# Altium PCB PCB1.PcbDoc (part 2 of 2)
Units mil, origin at the board's own origin, x right, y up, seen from the top; angles counter-clockwise.
Board outline 3553.34 x 3553.34 mil, 2 copper layers (Top Layer, Bottom Layer); 128 components, 103 nets, 393 pads, 82 vias.
Unrouted connection lines stored in the file: 8.
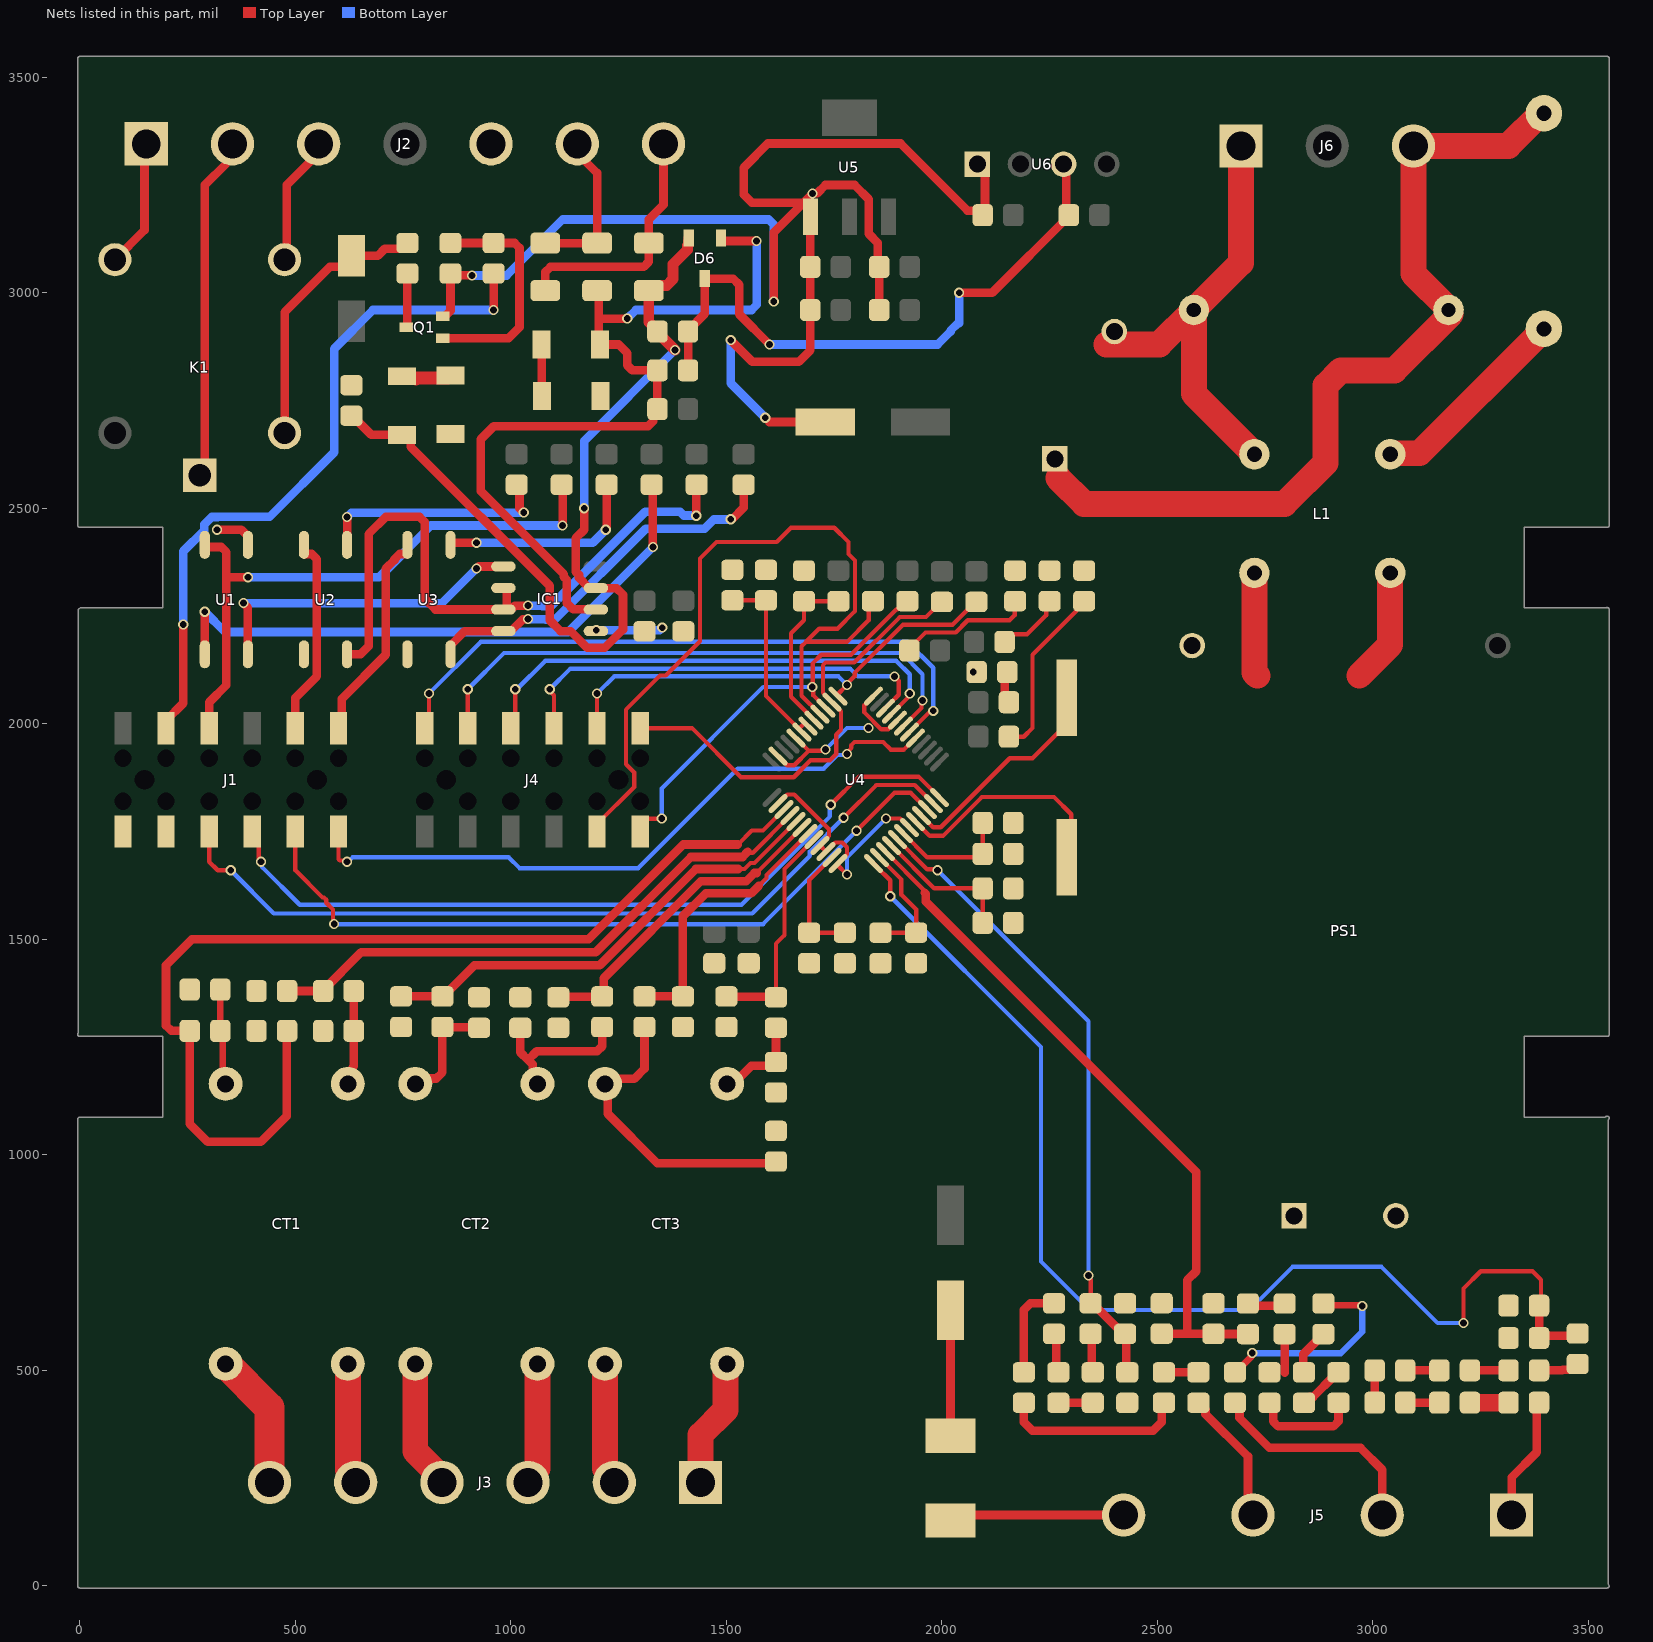
[diagram p2: the nets of this part, all layers, seen from the top]

## Via types
v1: diameter 23.62, hole 15.75, Top Layer to Bottom Layer, 82 vias

## Nets (pads, with @x,y where several pads share a name; then routed paths per layer and width w, separated by ;. In a path a pad name is that pad's centre, name@x,y a point inside that pad or via, vN(x,y) a via of type N, cw(c..) or ccw(c..) an arc to the next point about the centre after c; other vN are vias at no path point) (continued)
GND: C1.1 C2.2 C3.1 C4.2 C8.1 C10.1 C11.2 C12.1 C13.1 C14.1 C15.1 C16.2 C17.1 C18.1 C19.1 C20.1 C21.1 C22.1 C23.1 C24.2 C25.1 C26.1 C27.1 C29.1 C31.1 C32.1 F1.2 J1.9 J1.11 PS1.3 Q1.2 R1.2 R3.1 R8.1 R9.2 R12.1 R25.1 R26.2 R30.2 R33.2 R34.2 R35.2 R36.2 R38.2 R41.2 R44.2 R45.2 R59.2 U1.3 U4.2 U4.9 U4.10 U4.12 U4.19 U4.32 U4.36 U4.44 U4.47 U5.1 U6.1 | length 5139.5
  Top Layer w10: U4.2@1619.74,1815.02 1619.74,1816.12 1630.9,1827.28 1632.49,1827.28 1641.23,1836.01 1657.5,1836.01 1738.17,1755.34 1738.17,1739.68 U4.9@1730,1731.51 ; U4.47@1619.74,1924.98 1620.23,1924.98 1641.23,1903.99 1657.5,1903.99 1690.51,1937 1690.51,1937.73 ; U4.44@1661.5,1966.74 1690.51,1937.73 ; U4.9@1717.18,1717.58 1717.58,1717.58 U4.9@1720,1720 ; U4.9@1717.77,1717.77 1717.77,1716.99 U4.10@1731.1,1703.66 1731.59,1703.66 1752.58,1724.66 1768.86,1724.66 1779.93,1713.58 1779.93,1697.31 1758.94,1676.31 U4.12@1758.94,1675.82 1757.15,1674.03 1757.15,1672.85 v1(1780,1650) ; v1(1730,1940) 1727.73,1937.73 1690.51,1937.73 ; U4.36@1841.06,2064.18 1841.06,2063.69 1820.07,2042.69 1820.07,2026.42 1858.98,1987.5 1875.26,1987.5 1883.08,1995.33 U4.32@1884.67,1995.33 ; v1(1870,1780) 1870.33,1780.33 1903.1,1780.33 1911.41,1772.02 1911.41,1771.41 1923.48,1759.34 U4.19@1924.58,1759.34 ; v1(2072.76,2120) R33.2@2080.63,2119.99
  Top Layer w20: v1@317.99,2450 v1(318.27,2450) 374.85,2450 390,2434.85 U1.3@390,2410 ; Q1.2@842.32,2945.59 847.24,2945.59 860,2958.35 860,3036.69 863.99,3040.69 909.31,3040.69 v1(910,3040) ; v1(1510,2890) 1560,2840 1668.28,2840 1694.57,2866.28 C19.1@1694.57,2960.01 C18.1@1694.57,3060.01 1694.72,3060.16 1694.72,3144.72 1700,3150 1694.88,3155.12 1694.88,3200.79 1687.17,3208.5 1559.34,3208.5 1540.19,3227.65 1540.19,3290.19 1596.17,3346.17 1903.83,3346.17 2059.34,3190.66 2080.94,3190.66 2090.01,3181.59 2090.01,3180.01 2100,3190 2100,3300 2098.23,3298.23 U6.1@2082.28,3298.23 ; v1(1590,2710) 1600,2700 C16.2@1729.76,2700 ; v1(1610,2980) 1610,3140 1700.69,3230.69 1710.69,3230.69 1730,3250 1797.11,3250 1830,3217.11 1830,3136.67 1851.07,3115.6 1851.07,3051.07 1850,3050 1854.57,3045.43 C23.1@1854.57,2960.01 ; F1.2@2020,348.43 C24.2@2020,639.53
  Bottom Layer w10: v1(1730,1940) 1780,1990 v1(1830,1990) ; v1(1780,1650) 1780,1690 v1(1870,1780)
  Bottom Layer w20: v1(910,3040) 990,3040 1120,3170 1598.28,3170 1610,3158.28 v1(1610,2980) ; v1(1510,2890) 1510,2790 v1(1590,2710)
  other v1: 1700,3230
GND_RS485: C5.1 C6.1 C7.1 C9.1 C28.1 D3.1 D5.1 D6.3 IC1.5 J2.5 R5.1 U2.3 U3.3 U6.3 | length 1635.2
  Top Layer w20: R5.1@630.01,2785.43 R5.1@630.01,2793.3 ; J2.5@954.13,3345.47 J2.5@957.07,3342.54 ; IC1.5@1197.28,2215 1197.28,2216.28 v1(1198,2217) ; C6.1@1410.87,2819.99 1411.56,2820.68 1411.56,2909.3 C7.1@1410.87,2909.99 ; C7.1@1410.87,2911.96 1450,2951.1 1450,3030.94 1451.81,3032.76 1515.53,3032.76 1530,3018.28 1530,2950 v1(1600,2880) ; v1(2040,3000) 2116.53,3000 2294.57,3178.04 C28.1@2294.57,3180.01 2288.43,3186.15 2288.43,3292.09 U6.3@2282.28,3298.23
  Bottom Layer w20: v1(1198,2217) 1345,2217 v1(1351,2223) ; v1(1600,2880) 1990,2880 2020.19,2910.19 2020.19,2912.35 2037.65,2929.81 2039.81,2929.81 2040,2930 v1(2040,3000)
IAN: C2.1 R4.2 U4.4 | length 1338.9
  Top Layer w10: 1549.79,1703.46 1552.68,1700.57 1560.97,1700.57 U4.4@1647.58,1787.18
  Top Layer w20: C2.1@480.87,1380 R4.2@564.57,1380 564.57,1381.97 652.6,1470 1196.86,1470 1417.92,1691.06 1537.39,1691.06 1549.79,1703.46
IAP: C1.2 R2.2 U4.3 | length 2475.5
  Top Layer w10: 1526.74,1720 1558.99,1752.25 1584.81,1752.25 U4.3@1633.66,1801.1
  Top Layer w20: C1.2@480.87,1287.59 488.73,1287.59 480,1278.84 480,1090 420,1030 296.72,1030 255,1071.72 R2.2@255,1287.58 212.42,1287.58 200,1300 200,1440 260,1500 1180,1500 1400,1720 1526.74,1720
IBN: C4.1 R16.2 U4.6 | length 757.9
  Top Layer w10: 1570,1653.92 U4.6@1675.42,1759.34
  Top Layer w20: C4.1@1110.01,1365.43 1111.05,1366.48 1196.21,1366.48 1200,1362.69 1200,1360 1207.52,1367.52 R16.2@1211.8,1367.52 1215.49,1371.2 1215.49,1409.43 1441.11,1635.06 1546.45,1635.06 1565.31,1653.92 1570,1653.92
IBP: C3.2 R7.2 U4.5 | length 1084.1
  Top Layer w10: 1527.78,1663.06 1541.92,1663.06 1555.78,1676.92 1565.16,1676.92 U4.5@1661.5,1773.26
  Top Layer w20: C3.2@745.43,1367.52 R7.2@841.22,1367.52 843.19,1367.52 915.67,1440 1206.46,1440 1429.52,1663.06 1527.78,1663.06
ICN: C11.1 R24.2 U4.8 | length 523.9
  Top Layer w10: R24.2@1614.99,1365.43 1614.99,1489.91 1634.81,1509.72 1634.81,1663.05 1701.8,1730.05 1702.91,1730.05 1703.26,1730.4 U4.8@1703.26,1731.5
  Top Layer w20: C11.1@1500.01,1367.52 1501.05,1366.48 1603.52,1366.48 1610,1360 1614.99,1364.99 R24.2@1614.99,1365.43
ICP: C8.2 R19.2 U4.7 | length 648.9
  Top Layer w10: 1575.41,1624.42 1593,1642.01 1593,1649.08 U4.7@1689.34,1745.42
  Top Layer w20: R19.2@1309.99,1367.52 C8.2@1399.03,1367.52 1399.03,1553.37 1452.71,1607.06 1558.05,1607.06 1575.41,1624.42
ISOL_RE: IC1.2 IC1.3 R22.1 U2.4 | length 1515.6
  Top Layer w20: U2.4@620,2161.22 651.22,2161.22 670,2180 670,2440 710,2480 788.28,2480 800,2468.28 800,2290 825,2265 IC1.3@982.72,2265 ; IC1.2@982.72,2315 985,2315 990,2310 990,2266.67 990.98,2265.69 1001.12,2265.69 1009.17,2273.74 1039.31,2273.74 v1(1040,2274.43) ; v1(1430,2482.46) 1430,2540.94 1439.06,2550 1440,2550 1435.43,2554.57 R22.1@1431.05,2554.57
  Bottom Layer w20: v1(1040,2274.43) 1040.69,2273.74 1071.5,2273.74 1072.62,2272.62 1092.62,2272.62 1311.64,2491.64 1392.46,2491.64 1400.94,2483.16 1429.31,2483.16 v1(1430,2482.46)
ISOL_RX: IC1.1 U1.2 | length 760.8
  Top Layer w20: v1(380,2280) 380,2279.02 390,2269.02 U1.2@390,2161.22 ; v1(920,2360) 920.98,2360 925.98,2365 IC1.1@982.72,2365
  Bottom Layer w20: v1(380,2280) 840,2280 v1(920,2360)
ISOL_TX: IC1.4 R23.1 U3.4 | length 887.9
  Top Layer w20: U3.4@860,2161.22 860,2181.89 893.11,2215 1000.43,2215 1027.55,2242.12 1039.31,2242.12 v1(1040,2242.81) ; v1(1510,2474.68) 1510.69,2475.37 1514.42,2475.37 1539.99,2500.94 R23.1@1539.99,2554.57
  Bottom Layer w20: v1(1040,2242.81) 1040.69,2242.12 1079.88,2242.12 1081,2241 1101,2241 1312.65,2452.65 1449.47,2452.65 1470.8,2473.98 1509.31,2473.98 v1(1510,2474.68)
NetC2_1: C30.1 J6.1 L1.1 VR1.2 | length 1054.6
  Top Layer w60: 2381.59,2880 2504.72,2880 C30.1@2584.72,2960 ; J6.1@2693.9,3340.55 2693.9,3069.17 C30.1@2584.72,2960 ; L1.1@2725,2625.59 2584.72,2765.87 C30.1@2584.72,2960
NetC2_2: C30.2 J6.3 R62.1 VR1.1 | length 1985.2
  Top Layer w60: 2270.2,2569.8 2330,2510 2794.85,2510 2890,2605.15 2890,2784.85 2925.15,2820 3050,2820 3180,2950 3175.28,2954.72 C30.2@3175.28,2960 3175.28,2962.94 3093.9,3044.32 J6.3@3093.9,3333.9 ; J6.3@3093.9,3340.55 J6.3@3093.9,3333.9 ; R62.1@3396.65,3416.34 3389.89,3416.34 3314.1,3340.55 3100.55,3340.55 J6.3@3093.9,3333.9
NetCT1_1: CT1.1 J3.6 | length 317.3
  Top Layer w70: CT1.1@338.27,515.2 440,413.46 J3.6@440,240
NetCT1_2: CT1.2 J3.5 | length 282.8
  Top Layer w60: CT1.2@621.73,515.2 621.73,269.2 640,250.93 J3.5@640,240
NetCT1_3: CT1.3 R1.1 R2.1 | length 223.7
  Top Layer w15: R1.1@325.87,1383.36 R2.1@325.87,1287.58 332.07,1281.38 332.07,1171 CT1.3@338.27,1164.8
NetCT1_4: CT1.4 R3.2 R4.1 | length 220.9
  Top Layer w20: CT1.4@621.73,1164.8 632.97,1176.04 632.97,1203.43 635.43,1205.89 R3.2@635.43,1287.59 R4.1@635.43,1380
NetCT2_1: CT2.1 J3.4 | length 302.2
  Top Layer w60: CT2.1@778.27,515.2 778.27,511.73 780,510 778.27,508.27 778.27,312.66 840,250.93 J3.4@840,240
NetCT2_2: CT2.2 J3.3 | length 284.2
  Top Layer w60: J3.3@1040,240 1040,250.93 1061.73,272.66 CT2.2@1061.73,515.2
NetCT2_3: CT2.3 R7.1 R9.1 | length 265.4
  Top Layer w20: CT2.3@778.27,1164.8 790.46,1177 827,1177 841.22,1191.22 R7.1@841.22,1296.65 842.26,1295.61 925.35,1295.61 R9.1@926.39,1294.57
NetCT2_4: CT2.4 R12.2 R16.1 | length 376.1
  Top Layer w20: R12.2@1021.82,1294.57 1021.82,1238.18 1040,1220 ; CT2.4@1061.73,1164.8 1061.73,1180.7 1050.49,1191.94 1050.49,1209.51 1040,1220 ; R16.1@1211.8,1296.65 1211.8,1251.8 1200,1240 1060,1240 1040,1220
NetCT3_1: CT3.1 J3.2 | length 284.2
  Top Layer w60: CT3.1@1218.27,515.2 1218.27,272.66 1240,250.93 J3.2@1240,240
NetCT3_2: CT3.2 J3.1 | length 300.8
  Top Layer w60: J3.1@1440,240 1440,350 1498.15,408.15 1498.15,511.61 CT3.2@1501.73,515.2
NetCT3_3: CT3.3 R19.1 R26.1 | length 729.1
  Top Layer w15: R19.1@1309.99,1296.65 R19.1@1309.99,1299.99
  Top Layer w20: R19.1@1310,1300 1310,1200 1286.04,1176.04 1229.51,1176.04 CT3.3@1218.27,1164.8 1224.57,1158.5 1224.57,1095.43 1340,980 1611.69,980 1615,976.69 R26.1@1614.99,984.57
NetCT3_4: CT3.4 R24.1 R25.2 | length 213.4
  Top Layer w20: CT3.4@1501.73,1164.8 1516.28,1164.8 1558.06,1206.58 1606.14,1206.58 R25.2@1614.99,1215.43 R24.1@1614.99,1294.57
NetD1_1: D1.1 K1.COIL2 R6.2 | length 633.8
  Top Layer w20: K1.COIL2@475,2675 475,2955 580.22,3060.22 608.5,3060.22 630,3081.72 D1.1@630,3085.79 691.5,3085.79 707.52,3101.81 746.37,3101.81 R6.2@759.99,3115.43
NetD3_2: D4.2 D5.2 | length 120.3
  Top Layer w20: D4.2@1071.32,2880 1071.7,2879.62 1071.7,2760.38 D5.2@1072.09,2760
NetD4_2: D2.2 D3.2 | length 117.9
  Top Layer w30: D2.2@747.86,2806.1 753.53,2800.43 779.57,2800.43 780,2800 782.52,2802.52 854.61,2802.52 D3.2@860,2807.91
NetF1_1: F1.1 J5.4 | length 407
  Top Layer w20: F1.1@2020,151.57 2032.8,164.37 J5.4@2421.65,164.37
NetJ2_1: J2.1 K1.NC | length 308.1
  Top Layer w20: K1.NC@81.3,3076.57 150,3145.28 J2.1@150,3350
  Top Layer w70: J2.1@150,3350 154.13,3345.87 J2.1@154.13,3345.47
NetJ2_2: J2.2 K1.COM | length 800.4
  Top Layer w20: K1.COM@278.15,2576.57 290,2588.43 290,3250 340,3300 340,3331.34 J2.2@354.13,3345.47
NetJ2_3: J2.3 K1.NO | length 306.5
  Top Layer w20: K1.NO@475,3076.57 480,3081.57 480,3250 560,3330 554.13,3335.87 J2.3@554.13,3345.47
NetJ2_6: J2.6 R13.2 R15.2 | length 382.9
  Top Layer w20: R13.2@1080,3115.12 R15.2@1200,3115.12 1200,3277.92 1144.53,3333.4 1144.53,3345.47 J2.6@1154.13,3345.47
NetJ2_7: J2.7 R13.1 R18.2 | length 606.5
  Top Layer w20: R13.1@1080,3004.88 1080,3048.19 1091.81,3060 1308.19,3060 1320,3071.81 R18.2@1320,3115.12 1320,3170 1354.13,3204.13 J2.7@1354.13,3354.13 ; J2.7@1354.13,3345.47 J2.7@1354.13,3354.13 ; J2.7@1360,3360 J2.7@1354.13,3354.13
NetJ3_1: J5.1 R61.2 | length 287.1
  Top Layer w20: J5.1@3321.65,164.37 3321.65,251.65 3380,310 3380,419.57 R61.2@3385.43,425.01
NetJ3_2: J5.2 R48.2 | length 525.4
  Top Layer w20: R48.2@2680.01,424.57 2690.35,414.22 2690.35,389.65 2760,320 2971.21,320 3021.65,269.56 J5.2@3021.65,164.37
NetJ3_3: J5.3 R47.2 | length 323.1
  Top Layer w20: R47.2@2595.01,424.57 2594.57,424.57 2590,420 2600.27,420 2611.65,408.62 2611.65,398.35 2710,300 2710,176.02 J5.3@2721.65,164.37
NetJ5_6: J4.6 U4.34 | length 1012.8
  Top Layer w10: v1(1090,2080) 1090,2076.31 1100,2066.31 J4.6@1100,1989.98 ; U4.34@1868.9,2036.34 1868.9,2037.44 1880.73,2049.27 1881.83,2049.27 1900,2067.44 1900,2100 v1(1890,2110)
  Bottom Layer w10: v1(1090,2080) 1138,2128 1787.09,2128 1805.09,2110 v1(1890,2110)
NetJ5_8: J4.8 U4.33 | length 1159.6
  Top Layer w10: J4.8@1000,1989.98 1010,1999.98 v1(1010,2080) ; U4.33@1882.82,2022.42 1922.58,2062.18 1922.58,2067.39 v1(1925.19,2070)
  Bottom Layer w10: v1(1010,2080) 1013.69,2080 1079.69,2146 1894,2146 1925.19,2114.81 v1(1925.19,2070)
NetJ5_10: J4.10 U4.31 | length 1339.1
  Top Layer w10: J4.10@900,1989.98 v1(900,2080) ; U4.31@1910.66,1994.58 1952.58,2036.5 1952.58,2051.48 v1(1955.19,2054.08)
  Bottom Layer w10: v1(900,2080) 984,2164 1906,2164 1955.19,2114.81 v1(1955.19,2054.08)
NetJ5_12: J4.12 U4.30 | length 1504.6
  Top Layer w10: J4.12@800,1989.98 810,1999.98 v1(810,2070) ; U4.30@1924.58,1980.66 1971.31,2027.39 1977.39,2027.39 v1(1980,2030)
  Bottom Layer w10: v1(810,2070) 930,2190 1920,2190 1980,2130 v1(1980,2030)
NetJ6_1: J1.1 U4.29 | length 1564.9
  Top Layer w10: J1.1@600,1750.02 600,1685.86 603.25,1682.61 617.39,1682.61 v1(620,1680) ; v1(1779.62,1930) 1779.62,1933.69 1790,1944.06 1790,1950.47 1797.07,1957.54 1863.61,1957.54 1881.15,1940 1911.76,1940 U4.29@1938.5,1966.74
  Bottom Layer w10: v1(620,1680) 622.67,1680 632.67,1690 995.09,1690 1019.9,1665.19 1295.73,1665.19 1526.08,1895.54 1725.54,1895.54 1757.39,1927.39 1777.02,1927.39 v1(1779.62,1930)
NetJ6_2: J1.2 U3.2 | length 505.9
  Top Layer w20: J1.2@600,1989.98 607.48,1997.46 607.48,2057.48 710,2160 710,2360 730,2380 730,2381.93 741.87,2393.8 758.33,2393.8 760,2395.47 U3.2@760,2420
NetJ6_3: J1.3 U4.22 | length 1772.8
  Top Layer w10: J1.3@500,1750.02 500,1660 563.19,1596.81 566.63,1596.81 571.63,1591.81 571.63,1584.74 587.39,1568.98 587.39,1537.8 v1(590,1535.19) ; v1(1802.03,1752.03) 1890,1840 1927.44,1840 U4.22@1966.34,1801.1
  Bottom Layer w10: v1(590,1535.19) 1585.19,1535.19 v1(1802.03,1752.03)
NetJ6_4: J1.4 U2.2 | length 468
  Top Layer w20: J1.4@500,1989.98 500,2060 550,2110 550,2381.93 538.13,2393.8 521.67,2393.8 520,2395.47 U2.2@520,2415.16
NetJ6_5: J1.5 U4.24 | length 1857.6
  Top Layer w10: J1.5@400,1750.02 415.08,1734.94 415.08,1688.61 420,1683.69 v1(420,1680) ; v1(1742.03,1812.03) 1807.39,1877.39 1945.72,1877.39 U4.24@1994.18,1828.94
  Bottom Layer w10: v1(420,1680) 422.61,1677.39 422.61,1667.39 510,1580 1534.91,1580 1740.13,1785.22 1740.13,1810.13 v1(1742.03,1812.03)
NetJ6_7: J1.7 U4.23 | length 1947.1
  Top Layer w10: J1.7@300,1750.02 300,1680 320,1660 v1(350,1660) ; v1(1772.03,1782.03) 1848,1858 1937,1858 1979.98,1815.02 U4.23@1980.26,1815.02
  Bottom Layer w10: v1(350,1660) 450,1560 1560,1560 1693.7,1693.7 1693.7,1703.7 v1(1772.03,1782.03)
NetJ6_8: J1.8 R14.2 U1.4 | length 1424.8
  Top Layer w20: U1.4@290,2420 290,2411.67 291.67,2410 328.28,2410 340,2398.28 340,2340 ; J1.8@300,1989.98 300,2050 340,2090 340,2340 ; v1(390,2340) 340,2340 ; R14.2@1117.86,2554.57 1117.86,2557.86 1120,2560 v1(1120,2460)
  Bottom Layer w20: v1(390,2340) 694.51,2340 814.51,2460 v1(1120,2460)
NetJ6_10: J1.10 R10.1 | length 1611.8
  Top Layer w20: J1.10@200,1989.98 200,2007.4 240,2047.4 v1(240,2230) ; v1(960,2960) 960,3036.69 R10.1@959.99,3044.57
  Bottom Layer w20: v1(240,2230) 240,2400 288.46,2448.46 288.46,2462.35 305.92,2479.81 319.81,2479.81 320,2480 440,2480 590,2630 590,2870 680,2960 v1(960,2960)
NetL1_2: L1.2 PS1.2 | length 246.4
  Top Layer w60: L1.2@2725,2355 2725,2118.31 2731.89,2111.42
NetL1_3: L1.3 PS1.1 | length 268.3
  Top Layer w60: 2968.11,2111.42 3039.96,2183.27 L1.3@3039.96,2350
NetL1_4: L1.4 R62.2 | length 477.3
  Top Layer w60: L1.4@3039.96,2625.59 3042.04,2627.67 3107.98,2627.67 3390,2909.69 3390,2910 3396.34,2916.34 R62.2@3396.65,2916.34
NetLED1_2: LED4.2 R41.1 | length 419.4
  Top Layer w10: LED4.2@2145.43,1970.01 2190.01,1970.01 2210,1990 2210,2160 2312.39,2262.39 2312.39,2266.31 2326.08,2280 R41.1@2330,2280 ; R41.1@2329.99,2280.01 R41.1@2329.99,2284.57
NetLED2_2: LED3.2 R33.1 | length 70
  Top Layer w20: LED3.2@2145.43,2050.01 R33.1@2145.43,2119.99
NetLED3_2: LED2.2 R38.1 | length 158.1
  Top Layer w10: LED2.2@2145.43,2190.01 2163.03,2207.61 2197.61,2207.61 2241.8,2251.8 2241.8,2276.38 R38.1@2249.99,2284.57
NetLED4_2: LED1.2 R36.1 | length 309.4
  Top Layer w10: LED1.2@1924.57,2174.57 1961.94,2211.94 2031.94,2211.94 2060,2240 2156.93,2240 2168.73,2251.8 2168.73,2283.31 R36.1@2169.99,2284.57
NetQ1_1: Q1.1 R8.2 R10.2 | length 536.9
  Top Layer w20: Q1.1@842.32,2894.41 994.41,2894.41 1020,2920 1020,3103.72 1008.28,3115.43 R8.2@859.99,3115.43
NetQ1_3: Q1.3 R6.1 | length 125.5
  Top Layer w20: Q1.3@757.68,2920 757.68,2923.43 760,2925.75 760,3036.69 R6.1@759.99,3044.57
NetR4_1: R20.1 U1.1 | length 1385.8
  Top Layer w20: U1.1@290,2161.22 v1(290,2260) ; R20.1@1326.65,2554.57 1329.31,2551.91 1329.31,2410.69 v1(1330,2410)
  Bottom Layer w20: v1(290,2260) 337,2213 1133,2213 v1(1330,2410)
NetR7_2: R11.2 U2.1 | length 550.4
  Top Layer w20: U2.1@620,2415.16 v1(620,2480) ; R11.2@1013.46,2554.57 1020,2548.02 1020,2500 v1(1030,2490)
  Bottom Layer w20: v1(620,2480) 630,2490 v1(1030,2490)
NetR9_2: R17.2 U3.1 | length 480.8
  Top Layer w20: U3.1@860,2415.16 860,2418.33 861.67,2420 v1@919.02,2420 ; v1(1220,2450) 1222.25,2452.25 1222.25,2546.69 R17.2@1222.26,2554.57
  Bottom Layer w20: v1(920,2420) 1190,2420 v1(1220,2450)
NetR37_1: R58.2 R61.1 | length 89.6
  Top Layer w40: R58.2@3225,425 R61.1@3314.57,425.01
NetR38_1: R56.2 R58.1 | length 79.1
  Top Layer w20: R56.2@3075,425 R58.1@3146.25,425 ; R58.1@3146.27,425 R58.1@3154.13,425
NetR39_1: R55.2 R56.1 | length 80.8
  Top Layer w20: R56.1@3004.13,425 3004.13,495.87 3000,500 R55.2@3004.13,500
NetR40_1: R55.1 R57.2 | length 79.1
  Top Layer w20: R55.1@3075,500 R57.2@3154.13,500
NetR41_1: R57.1 R60.2 | length 101.6
  Top Layer w20: R57.1@3225,500 3300.94,500 3310,509.06 3310,510 3314.57,505.43 R60.2@3314.57,499.99
NetR42_1: R60.1 R63.2 | length 100.2
  Top Layer w20: R60.1@3385.43,499.99 3439.06,499.99 3440.01,500.94 3469.25,500.94 3475.01,506.7 R63.2@3475.01,514.57
NetR46_1: R48.1 R53.2 | length 490.1
  Top Layer w15: R48.1@2680.01,495.43 2681.43,495.43 2718.35,532.36 2718.35,538.35 v1(2720,540) ; R53.2@2885,655 2888.78,651.22 2973.36,651.22 v1(2975.01,649.57)
  Bottom Layer w15: v1(2720,540) 2924.57,540 2925.01,539.57 2975.01,589.57 v1(2975.01,649.57)
NetR47_1: R52.2 R53.1 | length 112.6
  Top Layer w20: R52.2@2830,495.43 2838.21,503.64 2838.21,537.34 2869.41,568.54 2869.41,570.51 2883.03,584.13 R53.1@2885,584.13
NetR48_1: R52.1 R54.2 | length 110.9
  Top Layer w20: R52.1@2839.99,424.57 2853.62,438.19 2860.79,438.19 2910,487.4 2910,490 2915.43,495.43 R54.2@2920,495.43
NetR49_1: R50.2 R54.1 | length 250.6
  Top Layer w20: R50.2@2760,424.57 2768.28,416.28 2768.28,381.72 2780,370 2908.29,370 2920.01,381.72 2920.01,416.69 R54.1@2920,424.57
NetR50_1: R50.1 R51.2 | length 89.1
  Top Layer w20: 2795.01,495 R51.2@2795.01,584.13
NetR51_1: R49.2 R51.1 | length 89.5
  Top Layer w20: R49.2@2710,655 2715.43,649.57 2789.58,649.57 R51.1@2795.01,655
NetR55_1: R46.2 R47.1 | length 80
  Top Layer w20: R46.2@2514.99,495.43 R47.1@2595.01,495.43
NetR56_1: R37.2 R46.1 | length 427.8
  Top Layer w20: R37.2@2190.01,424.57 2190.01,379.99 2210,360 2490,360 2510,380 2510,419.57 R46.1@2514.99,424.57
NetR57_1: R37.1 R39.2 | length 228.6
  Top Layer w20: R37.1@2190.01,495.43 2190.01,640.01 2205.43,655.43 2254.57,655.43 R39.2@2260,650 ; R39.2@2259.99,650.01 R39.2@2259.99,655.43
NetR58_1: R39.1 R40.2 | length 104.1
  Top Layer w20: R39.1@2259.99,584.57 2259.99,589.99 2264.99,585.01 2264.99,500.43 R40.2@2269.99,495.43
NetR59_1: R40.1 R43.2 | length 84.5
  Top Layer w20: R40.1@2269.99,424.57 2274.57,424.57 2280,430 2285.43,424.57 R43.2@2350.01,424.57
NetR60_1: R42.2 R43.1 | length 92.1
  Top Layer w20: R42.2@2345.01,584.57 2345.01,584.99 2347.51,582.49 2347.51,497.93 R43.1@2350.01,495.43
NetU6_20: U4.20 X1.1 | length 483.3
  Top Layer w10: U4.20@1938.5,1773.26 1971.76,1740 2002.73,1740 2092.73,1830 2260,1830 2300,1790 2300,1760 2290,1750 X1.1@2290,1740
NetU6_21: U4.21 X1.2 | length 558.3
  Top Layer w10: U4.21@1952.42,1787.18 1979.6,1760 1997.27,1760 2157.27,1920 2210,1920 2290,2000 X1.2@2290,2110
NRESET: C15.2 R27.1 U4.41 | length 394.3
  Top Layer w10: U4.41@1703.26,2008.5 1703.26,2008.99 1686.35,2025.9 1686.35,2026.51 1650,2062.86 1650,2210 1680.01,2240.01 C15.2@1680.01,2284.57 1685.43,2284.57 1690,2280 1694.57,2284.57 R27.1@1759.99,2284.57
PPEM_CK: J4.2 R31.1 U4.38 | length 1089.3
  Top Layer w10: J4.2@1300,1989.98 1420.02,1989.98 1533.85,1876.15 1656.15,1876.15 1695.19,1915.19 1740.28,1915.19 1754.81,1929.72 1754.81,1974.81 1766.01,1986.01 1766.01,2028.77 1745.02,2049.77 1745.02,2050.75 1724.02,2071.74 1724.02,2136.14 1729.88,2142 1796.54,2142 1902.49,2247.94 1963.21,2247.94 1998.03,2282.76 R31.1@1999.99,2282.76
PPEM_CS: J4.4 R32.1 U4.37 | length 1106.6
  Top Layer w10: J4.4@1200,1989.98 v1(1200,2070) ; U4.37@1758.94,2064.18 1757.15,2065.97 1757.15,2067.15 v1(1780,2090) 1780,2092.93 1797.49,2110.42 1797.49,2117.49 1909.94,2229.94 2024.49,2229.94 2077.3,2282.76 R32.1@2079.99,2282.76
  Bottom Layer w10: v1(1200,2070) 1240,2110 1760,2110 v1(1780,2090)
PPEM_DI: J4.3 R28.1 U4.40 | length 1856.5
  Top Layer w10: J4.3@1200,1750.02 1200,1767.44 1286.03,1853.47 1286.03,1887.19 1266.92,1906.3 1266.92,2032.86 1346.15,2112.1 1359.35,2112.1 1438.58,2191.33 1438.58,2383.44 1477.01,2421.87 1616.97,2421.87 1649.92,2454.81 1750.28,2454.81 1783.39,2421.7 1783.39,2393.87 1798.58,2378.67 1798.58,2261.33 1757.85,2220.59 1715.14,2220.59 1685.25,2190.71 ; 1674.4,2178.86 1674.4,2065.19 U4.40@1717.18,2022.42 ; 1674.4,2179.86 1684.54,2190 1685.25,2190 1780,2190 1830,2240 R28.1@1830,2274.57
  Top Layer w20: R28.1@1830,2274.57 R28.1@1839.99,2284.57
PPEM_DO: J4.1 R29.1 U4.39 | length 984.9
  Top Layer w10: J4.1@1300,1750.02 1300,1764.92 1315.08,1780 v1(1350,1780) ; U4.39@1731.1,2036.34 1701.82,2065.62 1701.82,2082.58 v1(1699.21,2085.19) 1700,2085.98 1700,2140 1720,2160 1789.09,2160 1895.03,2265.94 1896.78,2265.94 1915.4,2284.57 R29.1@1919.99,2284.57
  Bottom Layer w10: v1(1350,1780) 1350,1850 1585.19,2085.19 v1(1699.21,2085.19)
RS485_A: C6.2 D4.1 D6.1 IC1.6 R15.1 R21.1 | length 2000.4
  Top Layer w20: IC1.6@1197.28,2265 1196.59,2265.69 1144.31,2265.69 1130,2280 1130,2333.79 1122.74,2341.05 1122.74,2347.26 930,2540 930,2660 960,2690 1318.28,2690 1330,2701.72 1330,2727.87 1332.13,2730.01 R21.1@1340,2730.01 C6.2@1340,2819.99 1281.72,2820 1270,2831.72 1270,2860 1250,2880 D4.1@1207.15,2880 1203.57,2883.57 1203.57,2942.44 ; R15.1@1200,3004.88 1203.57,3001.31 1203.57,2942.44 ; v1(1270,2940) 1206.01,2940 1203.57,2942.44 ; D6.1@1487.4,3127.24 1487.4,3121.81 1489.21,3120 v1(1570,3120)
  Bottom Layer w20: v1(1270,2940) 1290,2960 1558.28,2960 1570,2971.72 v1(1570,3120)
RS485_B: C7.2 D2.1 D6.2 IC1.7 R5.2 R18.1 | length 2101.1
  Top Layer w20: R5.2@630.01,2714.57 630.01,2706.7 639.85,2706.69 676.27,2670.28 D2.1@747.86,2670.28 759.67,2670.28 767.84,2662.11 767.84,2642.3 1090,2320.14 1090,2240 1115,2215 1138.39,2215 1177.39,2176 1217.17,2176 1260,2218.83 1260,2299.67 1245.36,2314.31 1197.97,2314.31 IC1.7@1197.28,2315 1181.53,2315 1158,2338.53 1158,2345.39 1150.74,2352.65 1150.74,2430.74 1170,2450 v1(1170,2500)
  Top Layer w25: v1(1381.06,2867.22) 1380.8,2867.22 1340,2908.03 1340,2911.96 1320,2931.96 R18.1@1320,3004.88 1332.11,3016.99 1361.58,3016.99 1376.22,3031.63 1376.22,3066.06 1410,3099.84 1410,3109.85 1411.91,3111.76 1411.91,3120.06 1412.6,3120.75 D6.2@1412.6,3127.24
  Bottom Layer w20: v1(1170,2500) 1170,2656.17 v1(1381.06,2867.22)
VAN: C21.2 R30.1 U4.14 | length 292.4
  Top Layer w10: U4.14@1854.98,1689.74 1905.95,1638.77 1905.95,1603.42 1940.32,1569.05 R30.1@1940.32,1515.43 C21.2@1857.54,1515.43
VAP: C32.2 R59.1 R63.1 U4.13 | length 2712.2
  Top Layer w10: U4.13@1841.06,1675.82 1842.16,1675.82 1848.99,1668.99 1848.99,1667.89 1880,1636.89 v1(1880,1600) ; v1(3210,610) 3210,690 3250,730 3370,730 3390,710 3390,654.57 C32.2@3385.43,650.01
  Top Layer w20: C32.2@3385.43,650.01 3385.43,585.43 3390.65,580.21 3469.79,580.21 R63.1@3475.01,585.43
  Bottom Layer w10: v1(1880,1600) 2230,1250 2230,752.36 2342.36,640 2713.55,640 2813.55,740 3020,740 3150,610 v1(3210,610)
VBN: C27.2 R35.1 U4.16 | length 332.9
  Top Layer w10: U4.16@1882.82,1717.58 1982.21,1618.2 R35.1@2094.57,1618.2 C27.2@2094.57,1538.18
VBP: C31.2 R45.1 R49.1 U4.15 | length 1625.8
  Top Layer w10: U4.15@1868.9,1703.66 1960.22,1612.34 1960.22,1607.66
  Top Layer w20: 1960.22,1607.66 1962.56,1605.31 1962.56,1587.44 2590,960 2590,730 2569.39,709.39 2569.39,584.57 ; R45.1@2510,585 R45.1@2511.97,585 ; R45.1@2513.48,586.52 2515,585 2545.44,585 2545.87,584.57 2569.39,584.57 ; R49.1@2710,584.13 2709.78,584.35 2630.22,584.35 C31.2@2630.01,584.57 2569.39,584.57
VCN: C26.2 R34.1 U4.18 | length 282.1
  Top Layer w10: U4.18@1910.66,1745.42 1966.08,1690 2086.38,1690 C26.2@2094.57,1698.18 R34.1@2094.57,1770.01
VCP: C29.2 R42.1 R44.1 U4.17 | length 1472.4
  Top Layer w10: U4.17@1896.74,1731.5 1965.64,1662.61 1987.39,1662.61 v1(1990,1660) ; v1(2340,720) 2340,716.31 2345.01,711.31 R42.1@2345.01,655.43
  Top Layer w20: R42.1@2345.01,655.43 2349.57,655.43 2427.5,577.5 2427.5,497.93 R44.1@2430,495.43
  Bottom Layer w10: v1(1990,1660) 2340,1310 v1(2340,720)
VDD18: C12.2 C14.2 U4.42 U4.43 | length 460.9
  Top Layer w10: C12.2@1513.82,2286.38 1526.38,2286.38 1530,2290 1533.62,2286.38 C14.2@1591.82,2286.38 1591.82,2064.26 U4.43@1675.42,1980.66 1668.63,1987.45 1668.63,1988.63 1681.37,2001.37 1682.55,2001.37 U4.42@1689.34,1994.58
VREF: C17.2 C20.2 U4.11 | length 284.2
  Top Layer w10: U4.11@1745.02,1689.74 1745.02,1688.64 1738.19,1681.81 1737.09,1681.81 1691.99,1636.72 C17.2@1691.99,1515.43 1694.57,1515.43 1700,1510 1705.43,1515.43 C20.2@1774.77,1515.43
pads on no net: J1.13 J1.14 J1.15 J1.16 J1.17 J1.18 J1.19 J1.20 J1.21 J1.22 J1.23 J1.24 J2.4 J4.13 J4.14 J4.15 J4.16 J4.17 J4.18 J4.19 J4.20 J4.21 J4.22 J4.23 J4.24 J6.2 U4.35 U4.45 U4.46 U5.4

## Polygon pours and split planes (outlines as drawn)
GND on Top Layer "GND" (solid, remove dead copper, pour order 15): 191.84,1274.51 1399.51,1274.51 1400,1275 1400,1100 200,1100 195,1105
GND on Top Layer "GND" (solid, remove dead copper, pour order 14): 0,2050 1400,2050 1400,1297.62 1367.38,1265 -4.71,1265
GND on Top Layer "GND" (solid, remove dead copper, pour order 13): 3350,2450 3350,1100 1400,1100 1400,2450
GND on Top Layer "GND" (solid, remove dead copper, pour order 12): 1440,3549.77 3560,3549.77 3560,2460 3556.85,2456.85 1465.38,2456.85 1440,2482.23
GND on Top Layer "GND" (solid, remove dead copper, pour order 9): 0,0 0,1100 3550,1100 3546.35,1096.35 3546.35,4.05
GND_RS485 on Top Layer "GND" (solid, remove dead copper, pour order 0): 1430,3550 1430,2045 350,2045 350,3550
GND on Top Layer "GND" (solid, remove dead copper, pour order 17): 3335,2265 3541.1,2265 3542.82,2263.29 3542.82,1280.02 3546.85,1275.98 3352.94,1275.98 3351.47,1274.51
GND on Bottom Layer "GND" (solid, remove dead copper, pour order 6): -5.01,0 -5.01,1082.19 cw(c0,1082.19) -0.21,1087.2 1.97,1087.69 191.84,1087.69 191.84,1274.51 0,1274.51 cw(c0,1279.53) -3.54,1283.08 -3.54,2260.63 cw(c0.98,2262.8) -2.56,2266.34 1.97,2268.79 191.84,2268.79 191.84,2455.61 0,2455.61 cw(c0,2460.63) -5.01,2460.63 -5.01,3543.31 cw(c0,3543.31) 0,3548.32 3543.31,3548.32 cw(c3543.31,3543.31) 3548.32,3543.31 3548.32,2460.63 cw(c3543.31,2460.63) 3543.31,2455.61 3351.47,2455.61 3351.47,2268.79 3540.32,2268.79 cw(c3543.31,2264.76) 3548.32,2264.76 3548.32,1279.53 cw(c3543.31,1279.53) 3543.31,1274.51 3351.47,1274.51 3351.47,1087.69 3539.26,1087.69 3539.76,1088.19 cw(c3543.31,1084.65) 3548.32,1084.65 3546.35,1080.6 3546.35,4.05 3548.32,0 cw(c3543.31,0) 3543.31,-5.01 0,-5.01 cw(c0,0)

## Silkscreen, mask and mechanical layers (free items; w line width, h text height)
Mechanical 1:
  lines w10: 0,1082.19 0,0 ; 0.98,1081.69 1.97,1082.68 196.85,1082.68 196.85,1279.53 0,1279.53 1.48,1281 1.48,2263.29 ; 0.98,2262.8 1.97,2263.78 196.85,2263.78 196.85,2460.63 0,2460.63 0,3543.31 3543.31,3543.31 3543.31,2460.63 3346.46,2460.63 3346.46,2263.78 3542.32,2263.78 ; 1.48,1.48 0,0 ; 3543.31,1084.65 3541.34,1082.68 ; 3543.31,2264.76 3542.32,2263.78 ; 0,0 3543.31,0 3541.34,1.97 3541.34,1082.68 ; 3541.34,1082.68 3346.46,1082.68 3346.46,1279.53 3543.31,1279.53 3543.31,2262.8 3542.32,2263.78

## Text inside footprints (layer, text, board x,y; h text height)
CT1: Top Overlay "IN" at 515,560 h60 r90
CT2: Top Overlay "IN" at 955,560 h60 r90
CT3: Top Overlay "IN" at 1395,560 h60 r90